# Altium PCB main.PcbDoc
Units mm, origin at the board's own origin, x right, y up, seen from the top; angles counter-clockwise.
Board outline 41.2 x 14.1 mm, 4 copper layers (Top Layer, Int1 (GND), Int2 (PWR), Bottom Layer), stack 1.586 mm thick; 17 components, 15 nets, 68 pads, 55 vias.
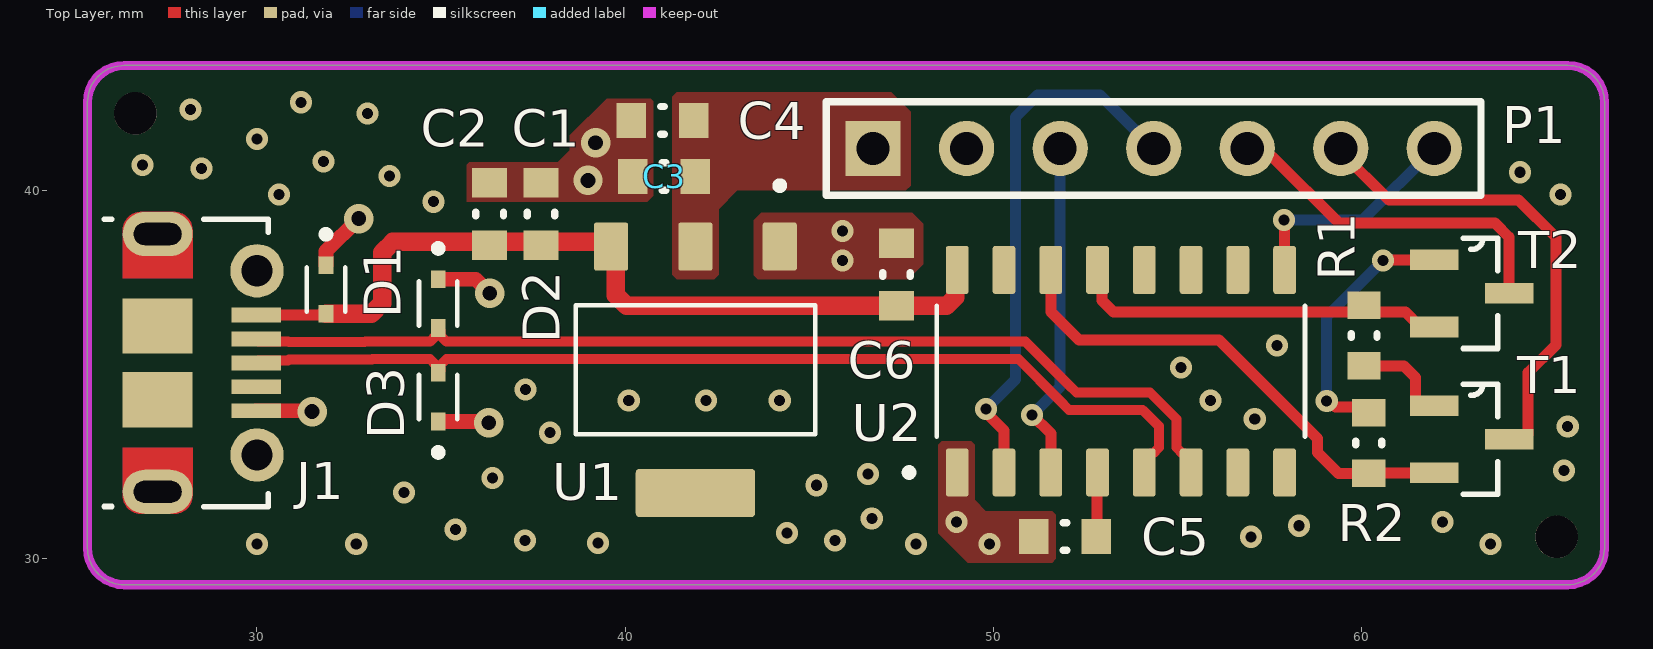
[diagram p0: Top Layer view]
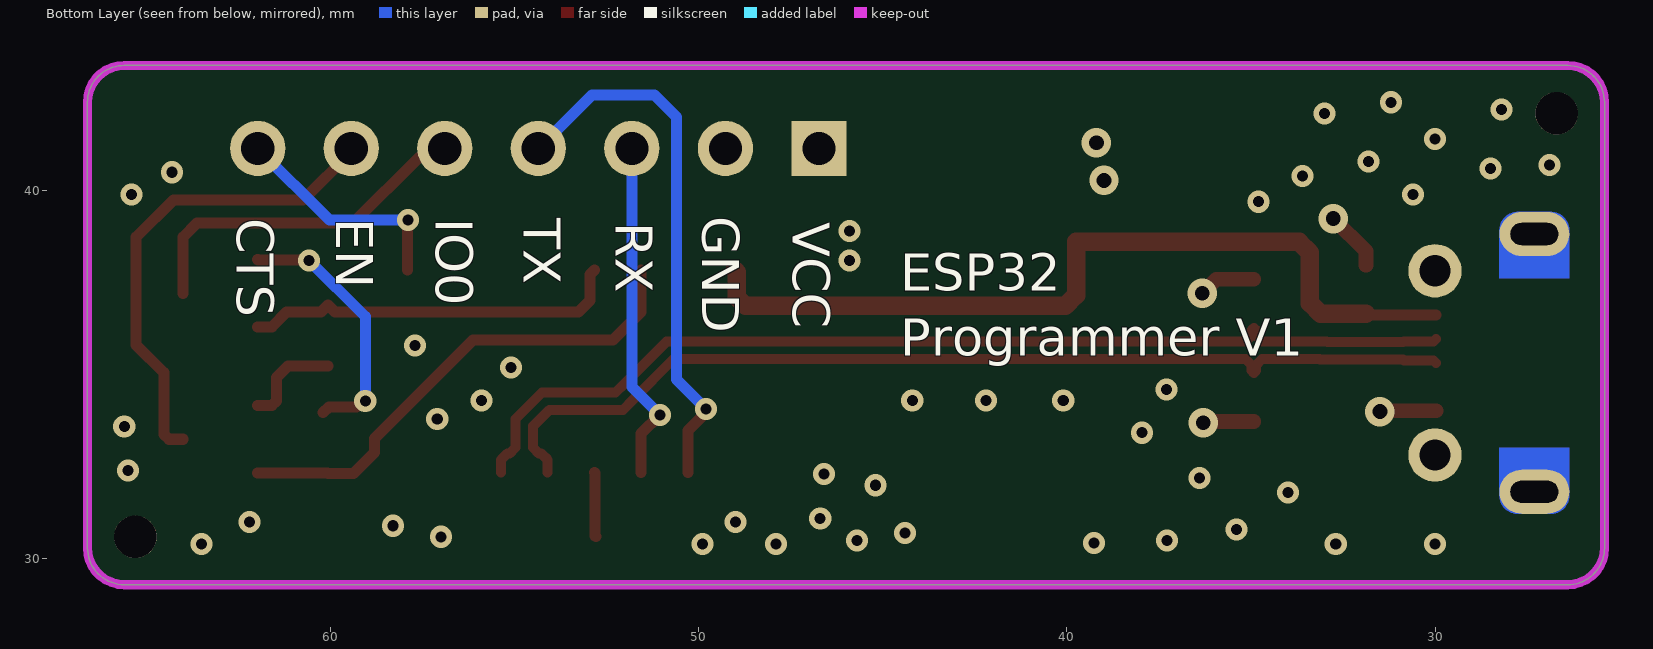
[diagram p1: Bottom Layer view, seen from below]
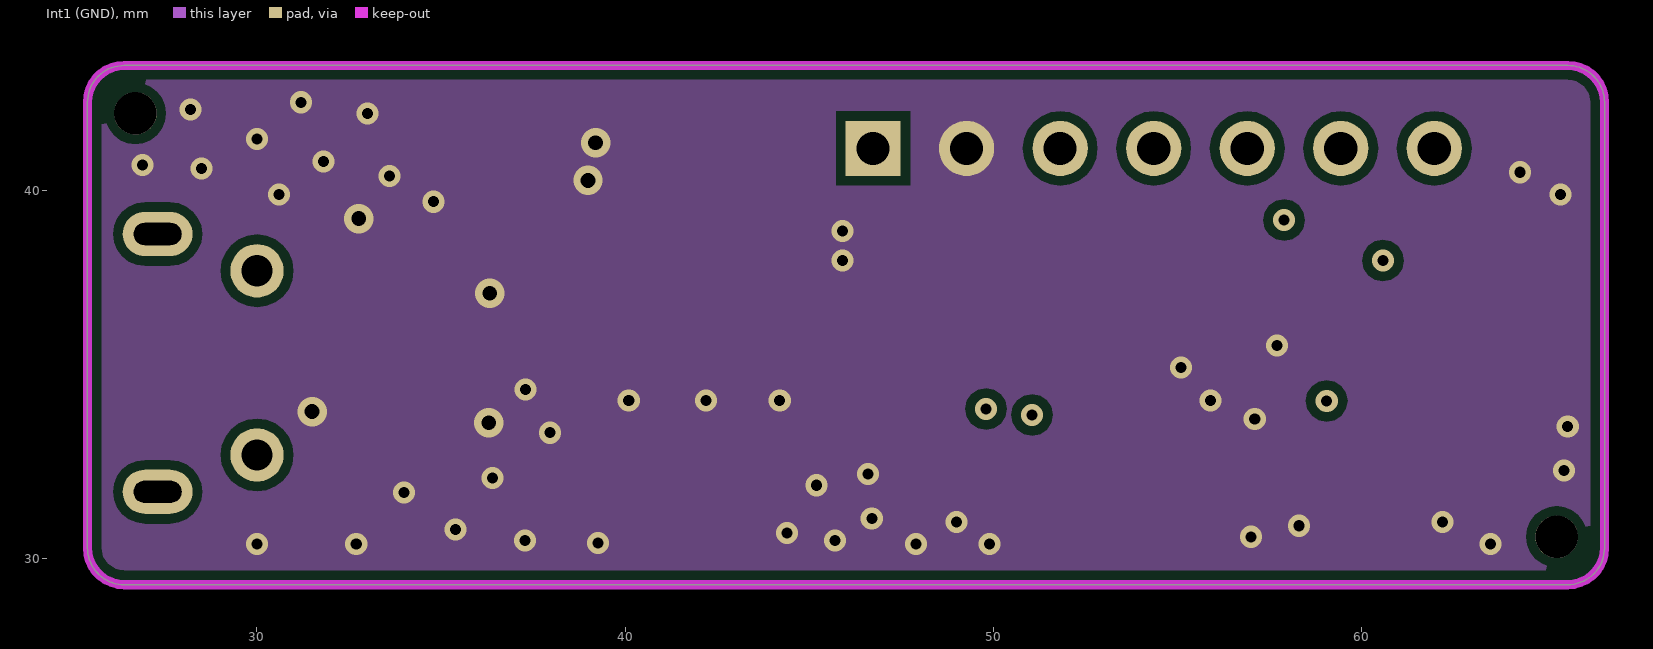
[diagram p2: Int1 (GND)]
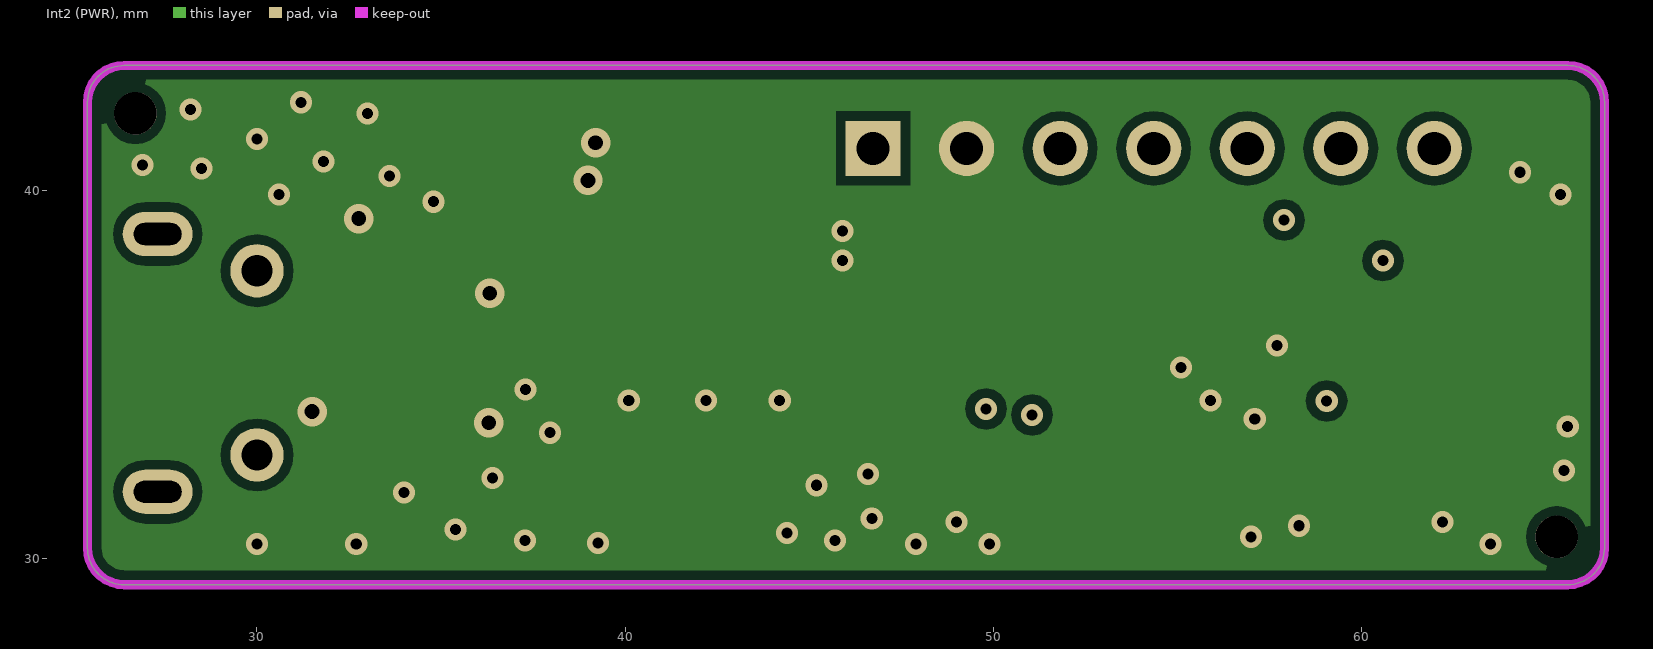
[diagram p3: Int2 (PWR)]
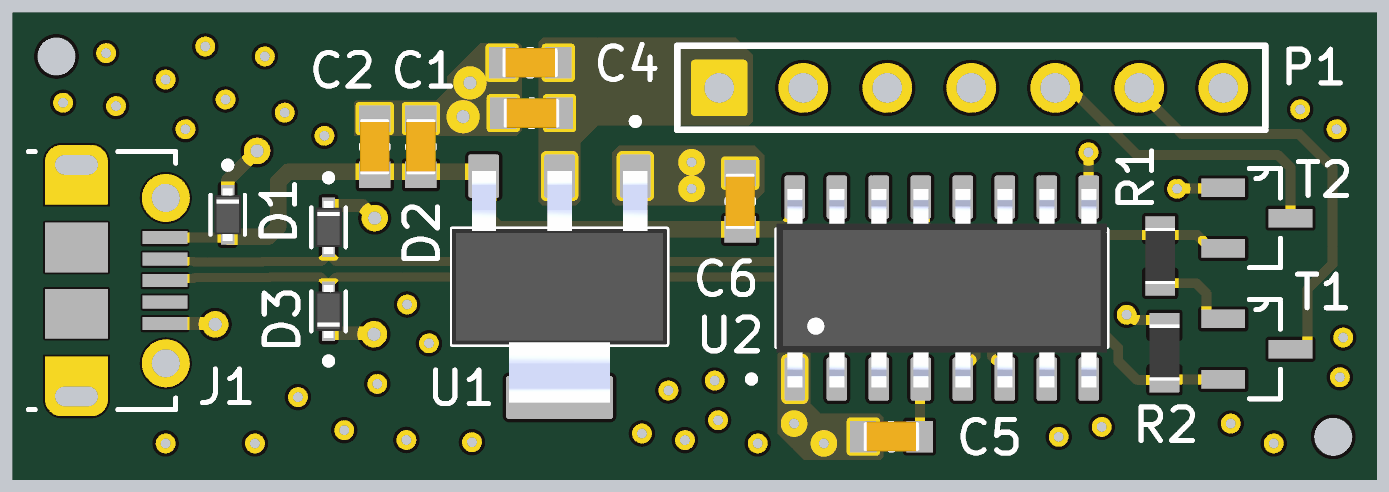
[diagram p4: 3D render of the assembled board from above, using the file's embedded part models]

## Layer stack, top to bottom
Top Solder: solder mask 0.0254, SM-001, Dk 4
Top Layer: signal copper 0.035
Dielectric 1: prepreg 0.2104, PP-017, Dk 4.6
Int1 (GND): signal copper 0.0152
Dielectric 3: core 1.065, Core-039, Dk 4.6
Int2 (PWR): signal copper 0.0152
Dielectric 5: prepreg 0.2104, PP-017, Dk 4.6
Bottom Layer: signal copper 0.035
Bottom Solder: solder mask 0.0254, SM-001, Dk 4

## Board outline
26.4,29.3 cw(c26.4,30.3) 25.4,30.3 25.4,42.4 cw(c26.4,42.4) 26.4,43.4 65.6,43.4 cw(c65.6,42.4) 66.6,42.4 66.6,30.3 cw(c65.6,30.3) 65.6,29.3 56.2,29.3

## Design rules (kind name [scope] priority, off if disabled: settings)
Clearance keepout [IsKeepOut] p1: gap=0.254 ignorepadtopadclearanceinfootprint=FALSE
Clearance [All] p2: gap=0.254 ignorepadtopadclearanceinfootprint=FALSE except(0: Arc-Hole Track-Hole SMDPad-Hole THPad-Hole Fill-Hole Poly-Hole Region-Hole Text-Hole; 0.09: Arc-Arc Arc-Track Track-Track; 0.127: SMDPad-SMDPad; 0.15: SMDPad-Text; 0.2: Arc-SMDPad Arc-THPad Track-SMDPad Track-THPad; 0.5: THPad-THPad Via-Hole)
DiffPairsRouting [All] p1: maxlimit=0.254 minlimit=0.203 mostfreqgap=0.254 toplayer_maxgap=0.203 toplayer_prefgap=0.203 toplayer_minwidth=0.271 toplayer_maxwidth=0.271 toplayer_prefwidth=0.271 bottomlayer_maxgap=0.203 bottomlayer_prefgap=0.203 bottomlayer_minwidth=0.271 bottomlayer_maxwidth=0.271 bottomlayer_prefwidth=0.271 impedanceprofiledriven=TRUE impedanceprofileid={771A9CD5-FD41-4252-8500-509B4D47A3BA} impedanceprofilevalue=90.000000 maxuncoupledlength=12.7
PolygonConnect PowerPuddleConnect [All] p1: connectstyle=Direct reliefconductorwidth=0.254 reliefentries=4 polygonreliefangle="90 Angle" airgapwidth=0.254
PolygonConnect PowerPlaneConnect [(InNamedPolygon('InternalGndLayer1') AND InNamedPolygon('InternalGndLayer2'))] p2: connectstyle=Relief reliefconductorwidth=0.254 reliefentries=4 polygonreliefangle="90 Angle" airgapwidth=0.254
RoutingVias [All] p1: holewidth=0.3 width=0.3 viastyle="Through Hole" minholewidth=0.2 minwidth=0.25 maxholewidth=6.3 maxwidth=6.3
SolderMaskExpansion [All] p1: expansion=0.102 istentingtop=FALSE
Width [All] p1: maxlimit=1 minlimit=0.127 preferedwidth=0.3
29 further rules are at their usual default settings.

## Classes and differential pairs
differential pair USB_D: +USB_D_P -USB_D_N

## Components (designator, comment, footprint, x,y, rotation, side; value= is the part's Value field where it differs from the comment)
C1 "10uF" CAP_0603 37.719,39.37 r270 top
C2 "100nF" CAP_0603 36.322,39.37 r270 top
C3 "100nF" CAP_0603 41.06,40.386 r0 top
C4 "10uF" CAP_0603 41.021,41.91 r0 top
C5 "100nF" CAP_0603 51.943,30.607 r0 top
C6 "100nF" CAP_0603 47.371,37.719 r90 top
D1 "LESD5D5.0CT1G" TVS_LESD5D5.0CT1G 31.877,37.973 r270 top
D2 "LESD5D5.0CT1G" TVS_LESD5D5.0CT1G 34.925,37.592 r270 top
D3 "LESD5D5.0CT1G" TVS_LESD5D5.0CT1G 34.925,33.732 r90 top
J1 "1050170001" MOLEX-1050170001 27.305,36.322 r270 top
P1 "Header 7" HDR1X7 46.736,41.148 r0 top
R1 "10k" RES_0603 60.071,36.068 r270 top
R2 "10k" RES_0603 60.198,33.147 r90 top
T1 "BC817" BJT_SOT-23-3_NPN 61.976,34.163 r0 top
T2 "BC817" BJT_SOT-23-3_NPN 61.976,38.125 r0 top
U1 "AMS1117-3.3" SOT229P700X180-4N 44.2,38.481 r270 top
U2 "CH340C" CH340x-SOP16 49.022,32.346 r90 top

## Footprints (in the part's own frame and the unit in brackets; to place one, negate y for a bottom-side part, rotate by r counter-clockwise, add the part's x,y. Pads: shape width x height; smd on the part's side, far side on the other; paste and mask are expansions set on the pad)
BJT_SOT-23-3_NPN [mil]
  rect 52x22 smd: 1(0,0) 2(0,-72) 3(80,-36)
  silkscreen extent 31,-95 68,23
CAP_0603 [mm] "Chip Capacitor, 2-Leads, Body 1,60x0,80mm, IPC Medium Density, 0603"
  rect 0.8x0.95 smd: 1(-0.85,0) 2(0.85,0)
  silkscreen extent -0.05,-0.38 0.05,0.38, body extent -0.85,-0.45 0.85,0.45, height 0.6
CH340x-SOP16 [mm]
  rrect25% 1.31x0.62 smd: 1(0,0) 2(0,-1.27) 3(0,-2.54) 4(0,-3.81) 5(0,-5.08) 6(0,-6.35) 7(0,-7.62) 8(0,-8.89) 9(5.5,-8.89) 10(5.5,-7.62) 11(5.5,-6.35) 12(5.5,-5.08) 13(5.5,-3.81) 14(5.5,-2.54) 15(5.5,-1.27) 16(5.5,0)
  silkscreen extent -0.1,-9.45 4.52,1.41, body extent -0.25,-9.45 5.75,0.56, height 1.8
HDR1X7 [mm] "Connector; Header; 7 Position"
  rect 1.5x1.5 hole 0.9: 1(0,0)
  round 1.5 hole 0.9: 2(2.54,0) 3(5.08,0) 4(7.62,0) 5(10.16,0) 6(12.7,0) 7(15.24,0)
  silkscreen extent -1.27,-1.27 16.51,1.27
MOLEX-1050170001 [mm]
  rect 0.4x1.35 smd mask+0.064: 1(-0.3,2.675) 2(0.35,2.675) 3(1,2.675) 4(1.65,2.675) 5(2.3,2.675)
  oval 1.2x1.9 hole 0.6 slot 1.3 at 90 deg mask+0: SH(-2.5,0) SH(4.5,0)
  round 1.45 hole 0.85 mask+0.064: SH(-1.5,2.7) SH(3.5,2.7)
  rect 1.5x1.9 smd mask+0.064: SH(0,0) SH(2,0)
  Top Layer region: -1.3,-0.95 -2.6,-0.95 -2.626,-0.949 -2.652,-0.947 -2.678,-0.944 -2.704,-0.939 -2.729,-0.933 -2.755,-0.926 -2.779,-0.917 -2.803,-0.907 -2.827,-0.896 -2.85,-0.883 -2.872,-0.869 -2.894,-0.855 -2.915,-0.839 -2.935,-0.822 -2.954,-0.804 -2.972,-0.785 -2.989,-0.765 -3.005,-0.744 -3.019,-0.722 -3.033,-0.7 -3.046,-0.677 -3.057,-0.653 -3.067,-0.629 -3.076,-0.605 -3.083,-0.579 -3.089,-0.554 -3.094,-0.528 -3.097,-0.502 -3.099,-0.476 -3.1,-0.45 -3.1,0.45 -3.099,0.476 -3.097,0.502 -3.094,0.528 -3.089,0.554 -3.083,0.579 -3.076,0.605 -3.067,0.629 -3.057,0.653 -3.046,0.677 -3.033,0.7 -3.019,0.722 -3.005,0.744 -2.989,0.765 -2.972,0.785 -2.954,0.804 -2.935,0.822 -2.915,0.839 -2.894,0.855 -2.872,0.869 -2.85,0.883 -2.827,0.896 -2.803,0.907 -2.779,0.917 -2.755,0.926 -2.729,0.933 -2.704,0.939 -2.678,0.944 -2.652,0.947 -2.626,0.949 -2.6,0.95 -1.3,0.95
  Top Layer region: 4.626,0.949 4.652,0.947 4.678,0.944 4.704,0.939 4.729,0.933 4.755,0.926 4.779,0.917 4.803,0.907 4.827,0.896 4.85,0.883 4.872,0.869 4.894,0.855 4.915,0.839 4.935,0.822 4.954,0.804 4.972,0.785 4.989,0.765 5.005,0.744 5.019,0.722 5.033,0.7 5.046,0.677 5.057,0.653 5.067,0.629 5.076,0.605 5.083,0.579 5.089,0.554 5.094,0.528 5.097,0.502 5.099,0.476 5.1,0.45 5.1,-0.45 5.099,-0.476 5.097,-0.502 5.094,-0.528 5.089,-0.554 5.083,-0.579 5.076,-0.605 5.067,-0.629 5.057,-0.653 5.046,-0.677 5.033,-0.7 5.019,-0.722 5.005,-0.744 4.989,-0.765 4.972,-0.785 4.954,-0.804 4.935,-0.822 4.915,-0.839 4.894,-0.855 4.872,-0.869 4.85,-0.883 4.827,-0.896 4.803,-0.907 4.779,-0.917 4.755,-0.926 4.729,-0.933 4.704,-0.939 4.678,-0.944 4.652,-0.947 4.626,-0.949 4.6,-0.95 3.3,-0.95 3.3,0.95 4.6,0.95
  Bottom Layer region: 4.626,0.949 4.652,0.947 4.678,0.944 4.704,0.939 4.729,0.933 4.755,0.926 4.779,0.917 4.803,0.907 4.827,0.896 4.85,0.883 4.872,0.869 4.894,0.855 4.915,0.839 4.935,0.822 4.954,0.804 4.972,0.785 4.989,0.765 5.005,0.744 5.019,0.722 5.033,0.7 5.046,0.677 5.057,0.653 5.067,0.629 5.076,0.605 5.083,0.579 5.089,0.554 5.094,0.528 5.097,0.502 5.099,0.476 5.1,0.45 5.1,-0.45 5.099,-0.476 5.097,-0.502 5.094,-0.528 5.089,-0.554 5.083,-0.579 5.076,-0.605 5.067,-0.629 5.057,-0.653 5.046,-0.677 5.033,-0.7 5.019,-0.722 5.005,-0.744 4.989,-0.765 4.972,-0.785 4.954,-0.804 4.935,-0.822 4.915,-0.839 4.894,-0.855 4.872,-0.869 4.85,-0.883 4.827,-0.896 4.803,-0.907 4.779,-0.917 4.755,-0.926 4.729,-0.933 4.704,-0.939 4.678,-0.944 4.652,-0.947 4.626,-0.949 4.6,-0.95 3.3,-0.95 3.3,0.95 4.6,0.95
  Bottom Layer region: -1.3,-0.95 -2.6,-0.95 -2.626,-0.949 -2.652,-0.947 -2.678,-0.944 -2.704,-0.939 -2.729,-0.933 -2.755,-0.926 -2.779,-0.917 -2.803,-0.907 -2.827,-0.896 -2.85,-0.883 -2.872,-0.869 -2.894,-0.855 -2.915,-0.839 -2.935,-0.822 -2.954,-0.804 -2.972,-0.785 -2.989,-0.765 -3.005,-0.744 -3.019,-0.722 -3.033,-0.7 -3.046,-0.677 -3.057,-0.653 -3.067,-0.629 -3.076,-0.605 -3.083,-0.579 -3.089,-0.554 -3.094,-0.528 -3.097,-0.502 -3.099,-0.476 -3.1,-0.45 -3.1,0.45 -3.099,0.476 -3.097,0.502 -3.094,0.528 -3.089,0.554 -3.083,0.579 -3.076,0.605 -3.067,0.629 -3.057,0.653 -3.046,0.677 -3.033,0.7 -3.019,0.722 -3.005,0.744 -2.989,0.765 -2.972,0.785 -2.954,0.804 -2.935,0.822 -2.915,0.839 -2.894,0.855 -2.872,0.869 -2.85,0.883 -2.827,0.896 -2.803,0.907 -2.779,0.917 -2.755,0.926 -2.729,0.933 -2.704,0.939 -2.678,0.944 -2.652,0.947 -2.626,0.949 -2.6,0.95 -1.3,0.95
  silkscreen extent -2.9,-1.45 4.9,3
RES_0603 [mm] "Chip Resistor, 2-Leads, Body 1,60x0,80mm, IPC Medium Density, 0603"
  rect 0.75x0.9 smd: 1(-0.825,0) 2(0.825,0)
  silkscreen extent -0.05,-0.35 0.05,0.35, body extent -0.85,-0.45 0.85,0.45, height 0.6
SOT229P700X180-4N [mm] "AMS1117-3.3"
  rrect15% 1.31x0.93 smd: 1(0,0) 2(0,-2.29) 3(0,-4.58)
  rrect15% 1.31x3.24 smd: 4(6.69,-2.29)
  silkscreen extent -1.75,-5.54 5.1,0.96, body extent -0.15,-5.54 6.84,0.96, height 1.8
TVS_LESD5D5.0CT1G [mm] "LESD5D5.0CT1G"
  rect 0.48x0.4 smd: 1(0,0) 2(1.32,0)
  silkscreen extent -0.94,-0.52 1.26,0.52, body extent -0.14,-0.4 1.46,0.4, height 0.7

## Part data
C1 C2 C3 C4 C5 C6: library part Cap_0603, "Capacitor SMD 0603 Generic"
D1 D2 D3: library part TVSDiode, "SOD-523 ESD Protection Devices ROHS / VRWM = 5V / VC = 11.6V / C = 15pF General Purpose speed"
J1: library part Molex_1050170001, "USB - micro B USB 2.0 Receptacle Connector 5 Position Surface Mount, Right Angle; Through Hole"
P1: "Header, 7-Pin", LatestRevisionDate=17-Jul-2002, LatestRevisionNote="Re-released for DXP Platform.", Publisher="Altium Limited"
R1 R2: library part Res_0603, "Resistor SMD 0603 Generic"
T1 T2: library part BJT_SOT23-3, "BJT NPN Transistor SOT23-3 pkg"
U1: "Sot223/Pkg 1-Amp 3.3-Volt Low Drop Out Voltage Regulatator"
U2: "2Mbps Transceiver USB 2.0 SOP-16 USB ICs ROHS"

## Free pads (board coordinates)
  round 1.152 hole 1.152 unplated: TH(26.7,42.1) TH(65.3,30.6)

## Via types
v1: diameter 0.6, hole 0.3, Top Layer to Bottom Layer, 49 vias
v2: diameter 0.8, hole 0.4, Top Layer to Bottom Layer, 6 vias

## Nets (pads, with @x,y where several pads share a name; then routed paths per layer and width w, separated by ;. In a path a pad name is that pad's centre, name@x,y a point inside that pad or via, vN(x,y) a via of type N, cw(c..) or ccw(c..) an arc to the next point about the centre after c; other vN are vias at no path point)
3V3: C3.2 C4.2 P1.1 U1.2
5V_VBUS: C1.2 C2.2 C6.1 D1.2 J1.1 U1.3 U2.16 | length 23.1
  Top Layer w0.3: J1.1 31.759,36.622 D1.2@31.877,36.74
  Top Layer w0.5: D1.2 33.108,36.653 33.401,36.946 33.401,38.315 33.694,38.608 35.814,38.608 36.322,38.608 37.211,38.608 37.719,38.608 39.751,38.608 39.751,37.162 40.044,36.869 C6.1 48.729,36.869 48.962,37.102 48.962,37.786 U2.16
base1: R1.2 T1.1 | length 2.7
  Top Layer w0.3: R1.2 61.15,35.243 61.466,34.927 61.466,34.292 61.595,34.163 T1.1
base2: R2.2 T2.1 | length 7.1
  Top Layer w0.3: v1(59.055,34.29) 59.136,34.29 59.298,34.128 60.042,34.128 R2.2 ; v1(60.579,38.1) 60.592,38.113 61.963,38.113 T2.1
  Bottom Layer w0.3: v1(59.055,34.29) 59.055,36.576 v1(60.579,38.1)
CTS: P1.7 U2.9 | length 6.2
  Top Layer w0.3: v1(57.9,39.2) 57.906,39.194 57.906,37.852 U2.9
  Bottom Layer w0.3: v1(57.9,39.2) 60.028,39.2 P1.7
DTR: R1.1 T2.2 U2.13 | length 10.4
  Top Layer w0.3: U2.13 52.953,37.725 52.953,37.011 53.262,36.703 59.881,36.703 R1.1 60.261,36.703 61.189,36.703 61.595,36.297 T2.2
EN: P1.6 T1.3 | length 13.1
  Top Layer w0.3: P1.6 59.436,41.056 60.741,39.751 64.262,39.751 65.278,38.735 65.278,35.814 64.518,35.054 64.518,33.378 64.389,33.249 T1.3
GND: C1.1 C2.1 C3.1 C4.1 C5.1 C6.2 D1.1 D2.1 D3.1 J1.5 P1.2 U1.1 U2.1 | length 6.1
  Top Layer w0.4: J1.5 31.478,34.022 v2(31.5,34) ; D1.1 31.877,38.354 v2(32.766,39.243) ; D3.1 36.268,33.732 v2(36.3,33.7) ; D2.1 35.941,37.592 v2(36.322,37.211)
  other v1: 30,30.4 32.7,30.4 47.9,30.4 49.9,30.4 63.5,30.4 39.262,30.437 37.279,30.504 45.7,30.5 57,30.6 44.4,30.7 35.4,30.8 58.3,30.9 49,31 62.2,31 46.7,31.1 34,31.8 45.2,32 36.4,32.2 46.6,32.3 65.5,32.4 37.96,33.426 65.6,33.6 57.1,33.8 40.1,34.3 42.2,34.3 44.2,34.3 55.9,34.3 37.3,34.6 55.1,35.2 57.7,35.8 45.9,38.1 45.9,38.9 34.8,39.7 30.6,39.9 65.4,39.9 33.6,40.4 64.3,40.5 28.5,40.6 26.9,40.7 31.812,40.797 30,41.4 33,42.1 28.2,42.2 31.2,42.4
  other v2: 38.993,40.278 39.2,41.3
IO0: P1.5 T2.3 | length 9.6
  Top Layer w0.3: P1.5 57.126,40.918 57.582,40.918 59.384,39.116 63.627,39.116 64.008,38.735 T2.3
NetC5_2: C5.2 U2.4 | length 1.8
  Top Layer w0.3: C5.2 52.813,30.627 52.813,32.327 U2.4
RTS: R2.1 T1.2 U2.14 | length 13.6
  Top Layer w0.3: U2.14 51.562,36.703 52.324,35.941 56.134,35.941 58.801,33.274 58.801,32.893 59.372,32.322 60.071,32.322 60.077,32.328 61.97,32.328 T1.2
RXD: P1.3 U2.3 | length 9.3
  Top Layer w0.3: v1(51.054,33.909) 51.562,33.401 U2.3
  Bottom Layer w0.3: v1(51.054,33.909) 51.816,34.671 P1.3
TXD: P1.4 U2.2 | length 14.8
  Top Layer w0.3: v1@49.784,34.036 49.784,33.991 50.292,33.483 U2.2
  Bottom Layer w0.3: v1@49.784,34.055 50.6,34.871 50.6,42 51.2,42.6 52.904,42.6 P1.4
  other v1: 49.803,34.074
USB_D_N: D2.2 J1.2 U2.6 | length 28
  Top Layer w0.271: J1.2 30.045,35.907 30.844,35.907 30.867,35.884 32.929,35.884 32.944,35.899 34.702,35.899 34.86,36.057 34.86,36.207 D2.2 34.99,36.207 34.99,36.057 35.148,35.899 50.877,35.899 52.024,34.752 52.256,34.52 54.253,34.52 54.974,33.799 54.974,33.024 55.132,32.866 55.197,32.866 55.372,32.691 U2.6
USB_D_P: D3.2 J1.3 U2.5 | length 27.3
  Top Layer w0.271: J1.3 30.045,35.387 30.844,35.387 30.867,35.41 33.125,35.41 33.14,35.425 34.702,35.425 34.86,35.267 34.86,35.117 D3.2 34.99,35.117 34.99,35.267 35.148,35.425 50.681,35.425 51.782,34.324 52.06,34.046 54.057,34.046 54.275,33.828 54.5,33.603 54.5,33.024 54.342,32.866 54.277,32.866 54.102,32.691 U2.5
pads on no net: J1.4 J1.SH U1.4 U2.7 U2.8 U2.10 U2.11 U2.12 U2.15

## Polygon pours and split planes (outlines as drawn)
3V3 on Top Layer "GNDPlaneI_Inner2" (solid, pour order 0): 41.275,37.719 41.402,37.592 42.418,37.592 42.545,37.719 42.545,39.497 43.053,40.005 47.625,40.005 47.752,40.132 47.752,42.148 47.228,42.672 41.402,42.672 41.275,42.545
GND on Top Layer "GND_L01_P003" (solid, pour order 3): 48.5,30.7 49.3,29.9 51.6,29.9 51.7,30 51.7,31.2 51.6,31.3 49.8,31.3 49.5,31.6 49.5,33.1 49.4,33.2 48.6,33.2 48.5,33.1
GND on Top Layer "GND_L01_P002" (solid, pour order 2): 47.8,37.6 47.8,37.7 48.1,38 48.1,39.1 47.8,39.4 43.7,39.4 43.5,39.2 43.5,37.7 43.6,37.6
GND on Top Layer "GND_L01_P001" (solid, pour order 1): 40.6,39.7 40.767,39.867 40.767,42.433 40.7,42.5 39.5,42.5 38.5,41.5 38.5,41.1 38.167,40.767 35.767,40.767 35.7,40.7 35.7,39.7
GND on Int1 (GND) "GNDPlaneI_Inner1" (solid, remove dead copper, pour order 4): 25.4,29.3 25.4,43.4 66.6,43.4 66.6,29.3
GND on Int2 (PWR) "GND_L03_P005" (solid, pour order 5): 25.4,29.3 25.4,43.4 66.6,43.4 66.6,29.3

## Keep-outs
Keep-Out Layer:
  lines w0.254: 56.2,29.3 65.6,29.3 ccw(c65.6,30.3) 66.6,30.3 66.6,42.4 ccw(c65.6,42.4) 65.6,43.4 29.7,43.4 26.4,43.4 ccw(c26.4,42.4) 25.4,42.4 25.4,30.3 ccw(c26.4,30.3) 26.4,29.3 56.2,29.3 ; 56.2,29.3 56.2,29.3

## Silkscreen, mask and mechanical layers (free items; w line width, h text height)
Bottom Overlay:
  text "GND" at 49.9,39.3 h1.02 r90
  text "TX" at 54.748,39.248 h1.02 r90
  text "IO0" at 57.148,39.248 h1.02 r90
  text "EN" at 59.848,39.248 h1.02 r90
  text "CTS" at 62.548,39.248 h1.02 r90
  text "VCC" at 47.448,39.148 h1.02 r90
  text "RX" at 52.248,39.148 h1.02 r90
  text "ESP32" at 44.522,37.278 h1.02
  text "Programmer V1" at 44.522,35.516 h1.02